# EAGLE board Lora GPS  HAT for RPi v1.4 (EAGLE 9.3.0)
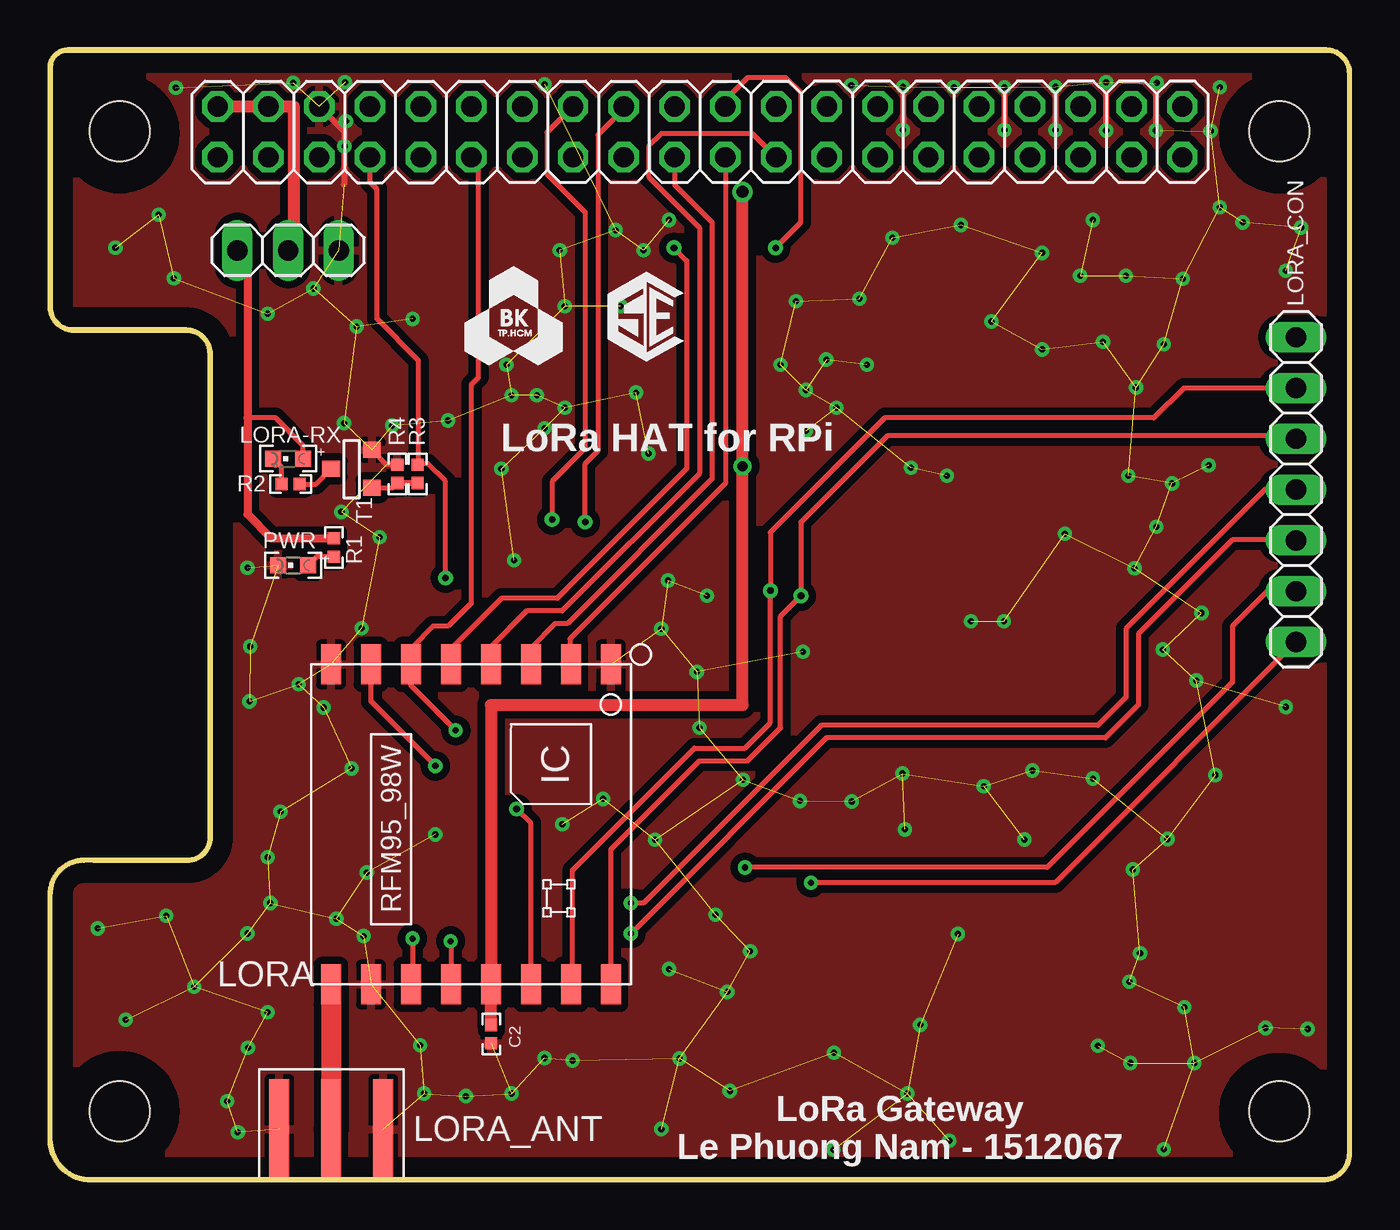
[diagram p0: board, top side]
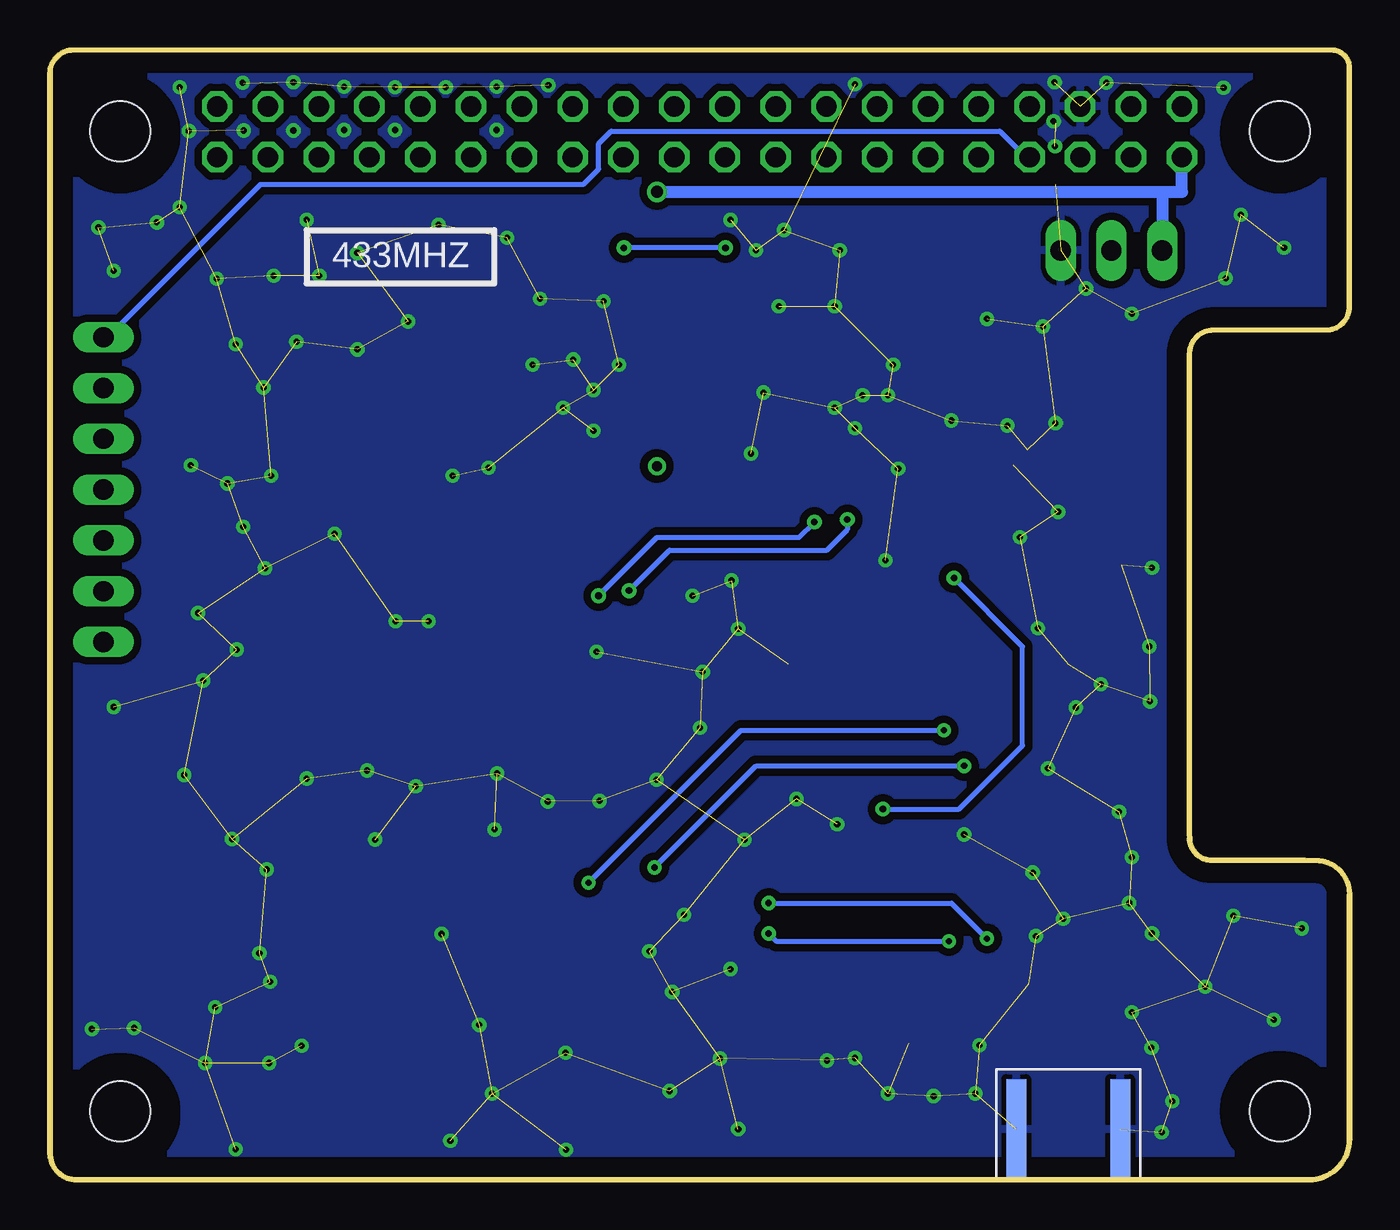
[diagram p1: board, bottom side, seen from below]

Size 65.01 x 56.5 mm. Coordinates in mm from the lower left corner, seen from the top.
Outline: 8,17.18 8,17.09 arc-90 6.88,15.98
Outline: 6.88,15.98 1.68,15.98 arc90 0,14.3 0,2.04 arc90 2.04,0 63.68,0 arc90 65.01,1.33 65.01,55.33 arc90 63.84,56.5 0.89,56.5 arc90 0.01,55.63 0.01,43.65 arc90 1.17,42.49 6.81,42.49 arc-90 8.01,41.29 8.01,17.11 arc-90 6.88,15.98
Copper layers (1*16): Top 0.035mm / dielectric 1.5mm / Bottom 0.035mm
Design rules "default *": minimum track width 10mil, minimum drill 12mil, track to track 6mil, track to pad 6mil, pad to pad 6mil, via to via 6mil, smd to smd 6mil, copper to edge 40mil, drill to drill 8mil, minimum pad ring 10mil, minimum via ring 8mil, stop-mask expansion 4mil, vias tented up to drill 30mil, thermal gap 10mil
Net classes: 2 gnd: width 0.254 mm, drill 0.61 mm, clearance 0.254 mm

## Footprints (pad centres in the part's own frame; a part is rotated, then mirrored left to right if it is on the bottom)
C0402 = smd 0.61 x 0.61: 1 -0.457,0; 2 0.457,0
1X03 = drill 1.016 long: 1 -2.54,0; 2 0,0; 3 2.54,0
RFM92_93W = smd 2 x 1: 1 -8,7; 2 -8,5; 3 -8,3; 4 -8,1; 5 -8,-1; 6 -8,-3; 7 -8,-5; 8 -8,-7; 9 8,-7; 10 8,-5; 11 8,-3; 12 8,-1; 13 8,1; 14 8,3; 15 8,5; 16 8,7
CHIPLED_0603 = smd 0.8 x 0.8: A 0,-0.75; C 0,0.75
SMA-KE = smd 1 x 5: P$1 -2.6,0; P$2 2.6,0; P$5 0,0 | smd 1 x 5 bottom: P$3 -2.6,0; P$4 2.6,0
1X07 = drill 1.016 long: 1 -7.62,0; 2 -5.08,0; 3 -2.54,0; 4 0,0; 5 2.54,0; 6 5.08,0; 7 7.62,0
R0402 = smd 0.61 x 0.61: 1 -0.457,0; 2 0.457,0
SOT-23 = smd 0.787 x 0.889: 1 0,-1.016; 2 -0.95,1.016; 3 0.95,1.016
RPILORASHIELD = drill 1.016 octagon: 1 -24.1,23.2; 2 -24.1,25.74; 3 -21.56,23.2; 4 -21.56,25.74; 5 -19.02,23.2; 6 -19.02,25.74; 7 -16.48,23.2; 8 -16.48,25.74; 9 -13.94,23.2; 10 -13.94,25.74; 11 -11.4,23.2; 12 -11.4,25.74; 13 -8.86,23.2; 14 -8.86,25.74; 15 -6.32,23.2; 16 -6.32,25.74; 17 -3.78,23.2; 18 -3.78,25.74; 19 -1.24,23.2; 20 -1.24,25.74; 21 1.3,23.2; 22 1.3,25.74; 23 3.84,23.2; 24 3.84,25.74; 25 6.38,23.2; 26 6.38,25.74; 27 8.92,23.2; 28 8.92,25.74; 29 11.46,23.2; 30 11.46,25.74; 31 14,23.2; 32 14,25.74; 33 16.54,23.2; 34 16.54,25.74; 35 19.08,23.2; 36 19.08,25.74; 37 21.62,23.2; 38 21.62,25.74; 39 24.16,23.2; 40 24.16,25.74 | hole 3: -29,24.5; -29,-24.5; 29,24.5; 29,-24.5

## Placement (x,y rotation side)
C2  0.1uF 10V  [C0402]  22.07,7.29 90 top
JP3  [1X03]  11.91,46.48 180 top
LORA  RFM92_93W  [RFM92_93W]  21.06,17.78 270 top
LORA-RX  BLUE  [CHIPLED_0603]  11.91,36.07 90 top
LORA_ANT  SMA-KE  [SMA-KE]  14.07,2.54 0 top
LORA_CON  [1X07]  62.33,34.52 270 top
PWR  Red  [CHIPLED_0603]  12.17,30.73 90 top
R1  330R  [R0402]  14.2,31.62 270 top
R2  2.2K  [R0402]  12.04,34.8 180 top
R3  47k  [R0402]  18.39,35.31 90 top
R4  47k  [R0402]  17.37,35.31 90 top
T1  AP2302GN-HF/SOT23  [SOT-23]  15.09,35.56 270 top
U$2  RPILORASHIELD  [RPILORASHIELD]  32.49,27.94 0 top

## Library data of the parts
C2 LORA-RX = dragino-passive
JP3 LORA_CON = pinhead
LORA PWR R1-R4 = dragino
LORA_ANT = sma-ke
T1 = dragino; OC_FARNELL: unknown; OC_NEWARK: unknown
U$2 = lorarpi

## Nets
3V3: C2.2 JP3.3 LORA-RX.A LORA.13 R1.1 U$2.1
5V: JP3.2 U$2.2 U$2.4
/RESET: R2.1 T1.1
ANT: LORA.9 LORA_ANT.P$5
DIO0: LORA.14 LORA_CON.1 R3.2 U$2.7
DIO1: LORA.15 LORA_CON.2 U$2.16
DIO2: LORA.16 LORA_CON.3 U$2.18
DIO3: LORA.11 LORA_CON.4
DIO4: LORA.12 LORA_CON.5
DIO5: LORA.7 LORA_CON.6
GND: C2.1 JP3.1 LORA.1 LORA.8 LORA.10 LORA_ANT.P$1 LORA_ANT.P$2 LORA_ANT.P$3 LORA_ANT.P$4 PWR.C R4.2 T1.2 U$2.6
MISO: LORA.2 U$2.21
MOSI: LORA.3 U$2.19
N$1: R3.1 R4.1 T1.3
N$6: PWR.A R1.2
N$60: LORA-RX.C R2.2
NSS: LORA.5 U$2.22
RESET: LORA.6 LORA_CON.7 U$2.11
SCK: LORA.4 U$2.23

## Tracks (layer width: path | path; a pad name or v marks a point on that pad's centre or on a via)
3V3  (via drill 0.51, 0.6)
  Top 0.254: LORA-RX.A 12.66,36.71 11.28,38.1 9.88,38.1 | C2.2
  Top 0.406: C2.2 22.06,7.75 | JP3.3 9.88,45.97 9.88,38.1 9.88,33.27 11.07,32.08 R1.1
  Top 0.61: v34.65,49.4 v34.65,35.69 34.65,23.75 22.06,23.75 LORA.13 22.07,9.76 C2.2
  Bottom 0.61: v34.65,49.4 9.37,49.4 | 9.37,49.4 JP3.3 | 9.37,49.4 8.39,49.4 U$2.1
5V
  Top 0.61: U$2.2 U$2.4 12.19,53.68 12.19,46.48 JP3.2
/RESET
  Top 0.254: R2.1 13.31,34.8 T1.1
ANT
  Top 1: LORA.9 14.06,2.55 LORA_ANT.P$5
DIO0  (via drill 0.33)
  Top 0.254: LORA.14 24.06,17.83 v23.34,18.54 | U$2.7 16.01,49.88 16.36,49.53 16.36,43.05 18.44,40.97 18.44,35.81 | v19.79,30.1 19.79,34.92 18.9,35.81 18.44,35.81 | 18.44,35.81 R3.2
  Bottom 0.254: U$2.7 16.19,51.14 17.5,52.45 36.93,52.45 37.57,51.82 37.57,50.55 38.33,49.78 54.48,49.78 62.13,42.14 LORA_CON.1 | v23.34,18.54 19.53,18.54 16.36,21.72 16.36,26.67 v19.79,30.1
DIO1  (via drill 0.33)
  Top 0.254: U$2.16 24.87,52.38 24.87,50.29 26.77,48.39 26.77,36.58 25.12,34.92 v25.12,33.02 | LORA.15 26.14,9.78 26.14,15.49 32.23,21.59 34.77,21.59 36.04,22.86 v36.04,29.46 36.04,32.38 41.76,38.1 55.22,38.1 56.72,39.6 LORA_CON.2
  Bottom 0.254: v36.04,29.46 34.01,31.5 26.14,31.5 25.12,32.51 v25.12,33.02
DIO2  (via drill 0.33)
  Top 0.254: LORA.16 28.06,16.52 32.49,20.95 34.9,20.95 36.55,22.61 36.55,28.19 v37.57,29.21 37.57,32.89 41.89,37.21 62.18,37.21 LORA_CON.3 | v26.77,32.89 26.77,35.81 27.41,36.45 27.41,52.25 28.71,53.55 U$2.18
  Bottom 0.254: v37.57,29.21 34.65,32.13 27.53,32.13 v26.77,32.89
DIO3  (via drill 0.3)
  Top 0.254: LORA_CON.4 60.83,34.52 60.81,34.54 53.82,27.56 53.82,24.13 52.43,22.73 38.58,22.73 29.69,13.84 v29.06,13.84 | v18.14,12.06 18.14,9.7 LORA.11
  Bottom 0.254: v29.06,13.84 19.91,13.84 v18.14,12.06
DIO4  (via drill 0.3)
  Top 0.254: LORA_CON.5 62.31,32 59.16,32 54.46,27.3 54.46,23.75 52.81,22.1 38.84,22.1 v29.06,12.32 | v20.04,11.94 20.06,11.92 LORA.12
  Bottom 0.254: v29.06,12.32 28.68,11.94 v20.04,11.94
DIO5  (via drill 0.3)
  Top 0.254: LORA_CON.6 62.31,29.46 60.94,29.46 59.16,27.69 59.16,24.89 49.89,15.62 v34.77,15.62 | v19.28,20.7 16.06,23.92 LORA.7
  Bottom 0.254: v34.77,15.62 29.69,20.7 v19.28,20.7
GND  (via drill 0.3)  (163 unrouted)
  Top 0.254: R4.2 16.85,35.76 T1.2
  Top 0.305: v14.81,52.93 14.71,52.83 14.71,50.29 | U$2.6 14.71,52.44 14.71,49.78 | v42.67,54.66 v42.67,52.5 | v47.75,54.64 v47.75,52.5 | v50.29,54.66 v50.29,52.5 | v52.83,54.89 v52.83,52.48 | v55.37,54.86 55.32,54.81 v55.32,52.48
  other vias: 3.28,46.61 14.73,51.69 12.17,54.86 5.44,48.26 6.2,45.08 10.9,43.31 13.18,44.58 15.34,42.67 18.14,43.05 28.3,47.5 25.5,46.48 22.83,40.77 25.76,43.69 28.55,43.69 29.69,46.48 30.96,48.01 19.91,37.97 23.09,39.24 9.88,30.61 10.01,26.67 11.53,18.41 10.9,16.13 13.69,23.62 5.82,13.21 9.88,12.32 7.21,9.65 3.78,8 8.86,3.94 18.52,6.73 10.9,8.38 15.85,15.37 15.09,20.57 57.25,5.84 56.74,8.64 55.73,1.52 43.54,7.75 39.22,6.35 42.9,4.32 34.01,4.45 33.88,9.4 35.03,11.43 26.14,5.97 30.58,2.54 23.09,4.32 24.74,6.1 20.8,4.19 42.77,17.53 46.71,19.69 40.11,18.92 42.65,20.32 52.17,20.07 48.74,17.02 30.96,10.54 25.63,17.78 27.66,19.05 19.28,17.27 32.36,25.4 30.58,27.56 32.87,29.21 23.22,30.99 24.74,37.59 25.76,38.61 29.31,39.37 22.58,35.56 24.36,39.24 29.95,36.32 47.73,27.94 46.08,27.94 49.63,46.36 42.14,47.12 45.57,47.75 52.17,48.01 51.54,45.21 49.63,41.53 47.09,42.93 52.68,41.91 53.82,45.21 55.73,41.78 54.33,39.62 40.49,44.07 37.31,43.94 36.55,40.77 38.84,41.02 40.87,40.77 37.82,39.5 37.82,37.47 59.66,47.88 58.52,48.64 62.59,47.62 61.82,45.47 32.49,22.61 9.98,23.93 50.77,32.31 53.95,35.2 57.96,35.74 55.35,32.66 54.25,30.58 56.13,34.82 57.61,28.35 55.68,26.52 57.35,24.97 49.15,20.47 31.5,6.07 39.19,1.5 44.98,1.96 54.05,5.84 52.43,6.71 60.81,7.59 62.92,7.54 45.42,12.29 54.53,11.33 55.91,17.04 54.18,15.52 58.29,20.24 61.82,23.65 54,9.91 14.33,13.06 15.7,12.19 9.91,6.6 9.4,2.39 18.72,4.32 14.76,54.89 6.3,54.61 24.74,54.79 45.21,54.64 40.08,54.74 56.67,45.06 58.52,54.64 58.06,52.45 33.3,13.26 37.52,18.95 30.91,29.97 15.6,27.58 12.45,24.79 14.71,37.85 17.12,37.72 16.48,32.13 14.58,33.4 39.34,38.61 11.02,13.84 2.39,12.57 37.67,26.41 34.67,20.01 30.27,17.01 43.07,35.61 44.87,35.21
  pour Bottom (isolate 0.381): 0.1,56.52 0.1,42.42 8.1,42.42 8.1,16 0.1,16 0.1,0 65,0 65,56.52
  pour Top (isolate 0.381): -0.03,56.52 65,56.52 65,0 0.1,0 0.1,16 8.1,16 8.1,42.42 -0.03,42.42
MISO
  Top 0.254: U$2.21 33.79,34.83 26.01,27.05 26.01,25.83 LORA.2
MOSI
  Top 0.254: U$2.19 31.25,49.75 33.12,47.88 33.12,35.05 25.88,27.81 25.25,27.81 24.1,26.67 24.1,25.83 LORA.3
N$1
  Top 0.254: T1.3 17.13,34.61 R4.1
  Top 0.305: R4.1 R3.1
N$6
  Top 0.254: R1.2 13.35,31.17 PWR.A
N$60
  Top 0.254: R2.2 11.58,35.65 LORA-RX.C
NSS  (via drill 0.33)
  Top 0.254: LORA.5 20.06,26.56 22.58,29.08 25.38,29.08 31.85,35.56 31.85,45.97 v31.22,46.61 | v36.3,46.61 37.57,47.88 37.57,54.36 36.8,55.12 34.9,55.12 33.79,54 U$2.22
  Bottom 0.254: v31.22,46.61 v36.3,46.61
RESET  (via drill 0.3)
  Top 0.254: LORA_CON.7 50.29,14.86 v38.08,14.86 | v20.29,22.48 18.06,24.72 LORA.6 18.14,25.86 18.14,26.67 19.15,27.69 19.91,27.69 21.09,28.86 21.09,39.78 21.44,40.13 21.44,50.79 U$2.11
  Bottom 0.254: v38.08,14.86 30.45,22.48 v20.29,22.48
SCK
  Top 0.254: U$2.23 35.14,52.32 30.58,52.32 29.95,51.69 29.95,50.16 32.49,47.62 32.49,35.31 25.63,28.45 23.85,28.45 22.07,26.67 22.07,25.8 LORA.4

## Text on the board
tPlace: LORA
tNames: LoRa HAT for RPi | LoRa Gateway / Le Phuong Nam - 1512067
bNames: 433MHZ
tDocu: 3.3V | 5V | GND | DIO0 | DIO1 | DIO2 | DIO3 | DIO4 | DIO5 | RESET